# Altium PCB soldeerstation.PcbDoc (part 2 of 2)
Units mm, origin at the board's own origin, x right, y up, seen from the top; angles counter-clockwise.
Board outline 176.66 x 114.17 mm, 2 copper layers (Top Layer, Bottom Layer); 77 components, 72 nets, 293 pads, 46 vias.
Unrouted connection lines stored in the file: 9.
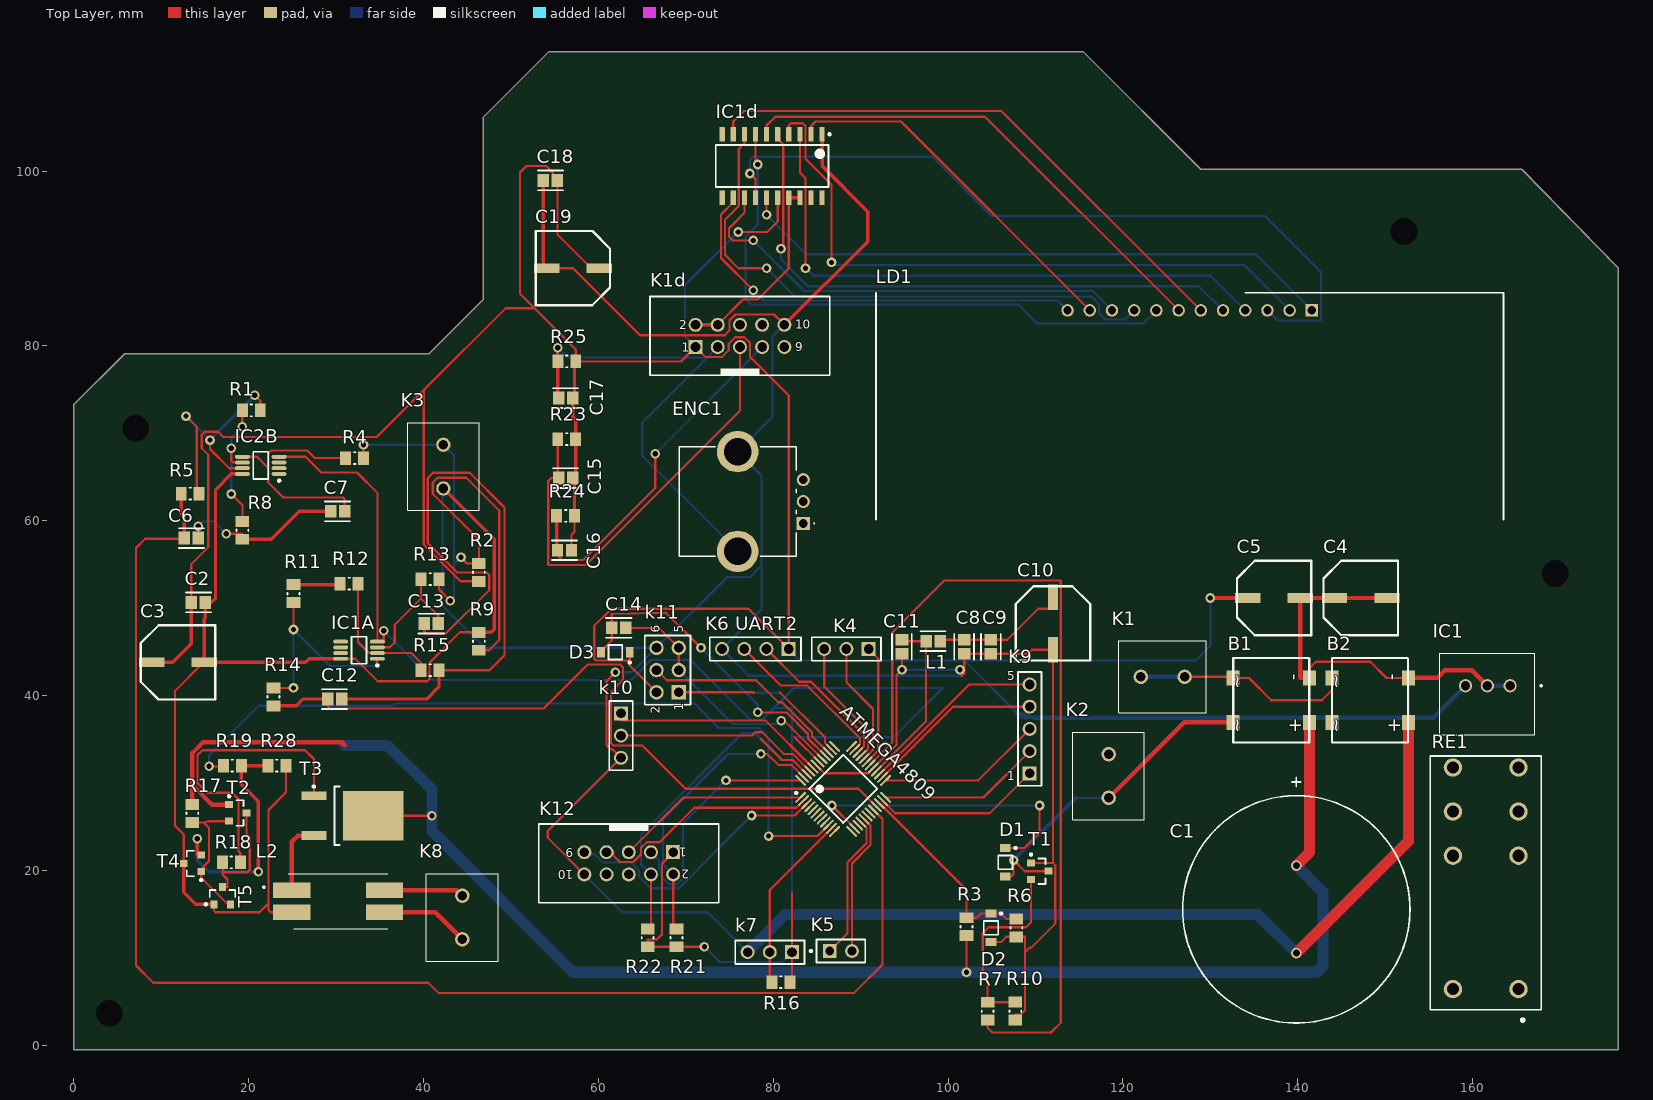
[diagram p0: Top Layer view]

## Via types
v1: diameter 1.1, hole 0.6, Top Layer to Bottom Layer, 46 vias

## Nets (pads, with @x,y where several pads share a name; then routed paths per layer and width w, separated by ;. In a path a pad name is that pad's centre, name@x,y a point inside that pad or via, vN(x,y) a via of type N, cw(c..) or ccw(c..) an arc to the next point about the centre after c; other vN are vias at no path point) (continued)
pads on no net: ATMEGA4809.4 ATMEGA4809.5 ATMEGA4809.6 ATMEGA4809.7 ATMEGA4809.8 ATMEGA4809.9 ATMEGA4809.12 ATMEGA4809.13 ATMEGA4809.15 ATMEGA4809.18 ATMEGA4809.19 ATMEGA4809.36 ATMEGA4809.37 ENC1.A1 ENC1.B1 ENC1.C1 IC1A.5 IC1A.6 IC1A.7 IC1d.10 IC1d.11 IC1d.19 IC1d.20 IC2B.1 IC2B.2 IC2B.3 K1d.6 K1d.8 K1d.9 K12.6 K12.8 RE1.1 RE1.2 RE1.3 RE1.4 RE1.5 RE1.6 RE1.7 RE1.8

## Text inside footprints (layer, text, board x,y; h text height)
B1: Top Overlay "~" at 132.461,42.545 h1.52 r270; Top Overlay "~" at 132.461,37.465 h1.52 r270; Top Overlay "-" at 138.938,42.545 h1.52 r270; Top Overlay "+" at 139.065,37.465 h1.52 r270
B2: Top Overlay "+" at 150.368,37.465 h1.52 r270; Top Overlay "-" at 150.241,42.545 h1.52 r270; Top Overlay "~" at 143.764,37.465 h1.52 r270; Top Overlay "~" at 143.764,42.545 h1.52 r270
K1d: Top Overlay "9" at 82.54,79.413 h1.02; Top Overlay "10" at 82.54,81.953 h1.02; Top Overlay "2" at 69.26,81.893 h1.02; Top Overlay "1" at 69.56,79.353 h1.02
K9: Top Overlay "5" at 106.793,41.797 h1.02; Top Overlay "1" at 106.793,30.367 h1.02
k11: Top Overlay "6" at 67.031,47.21 h1.02 r90; Top Overlay "5" at 69.731,47.21 h1.02 r90; Top Overlay "2" at 67.031,37.97 h1.02 r90; Top Overlay "1" at 69.731,38.27 h1.02 r90
K12: Top Overlay "9" at 57.146,22.582 h1.02 r180; Top Overlay "10" at 57.146,20.042 h1.02 r180; Top Overlay "2" at 70.426,20.102 h1.02 r180; Top Overlay "1" at 70.126,22.642 h1.02 r180